# Altium PCB Carduino.PcbDoc
Units mm, origin at the board's own origin, x right, y up, seen from the top; angles counter-clockwise.
Board outline 89 x 51 mm, 2 copper layers (Top Layer, Bottom Layer); 29 components, 41 nets, 160 pads, 48 vias.
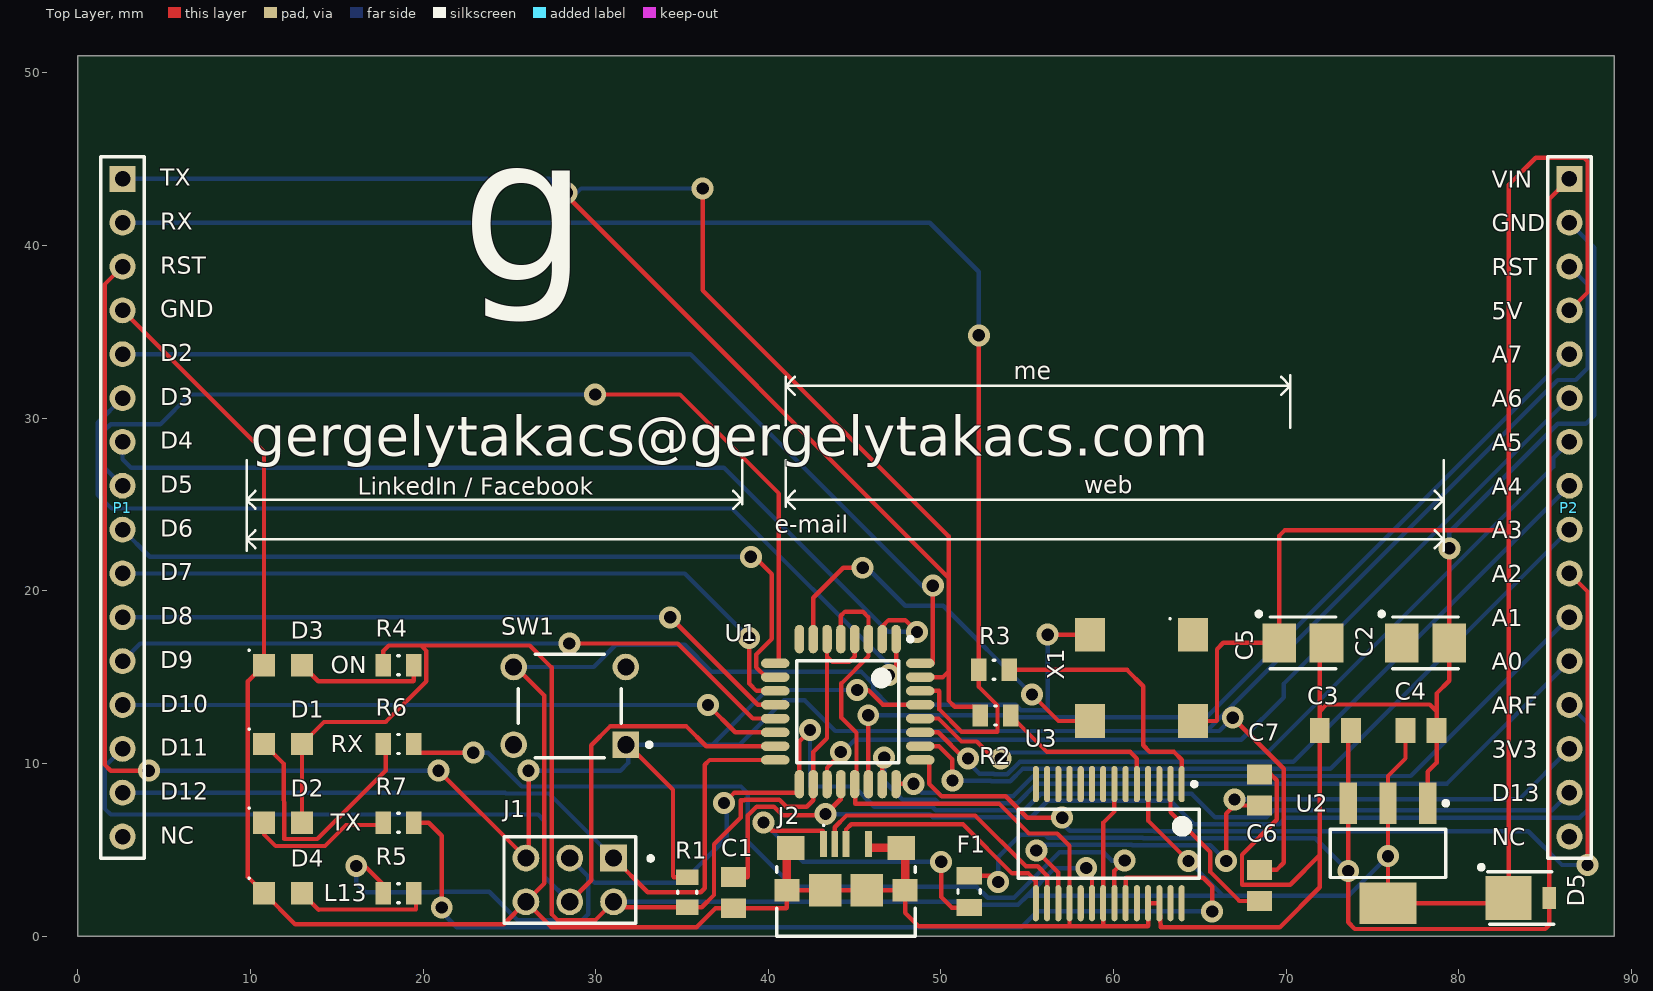
[diagram p0: Top Layer view]
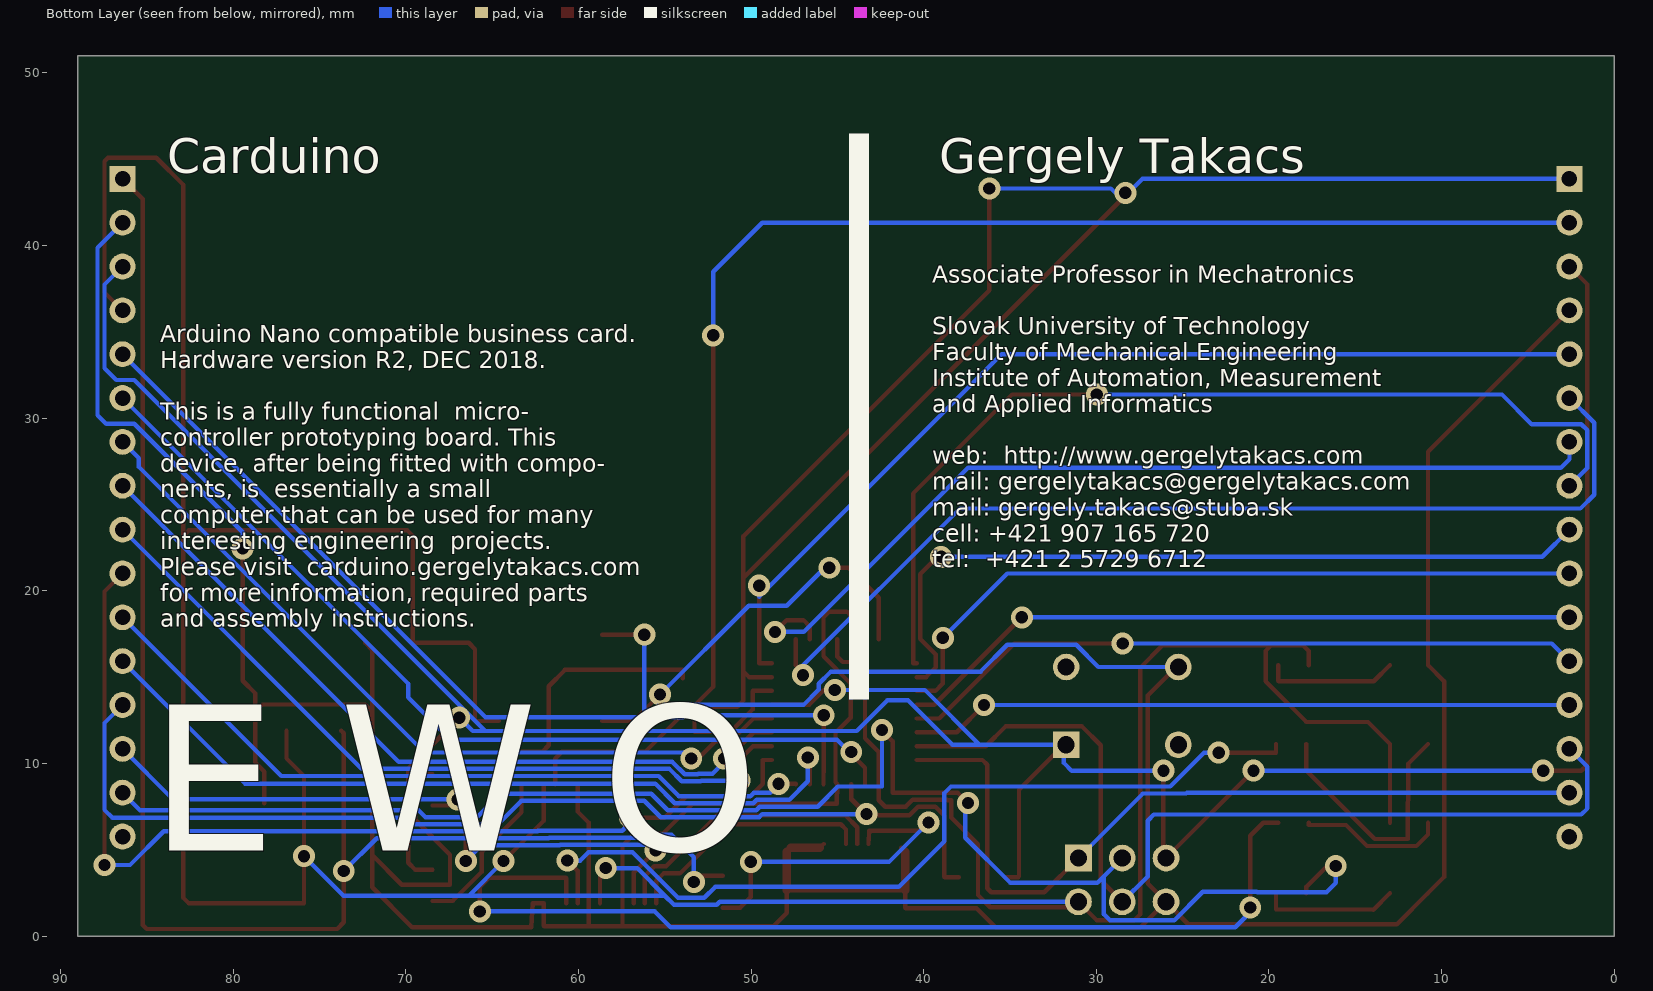
[diagram p1: Bottom Layer view, seen from below]

## Layer stack, top to bottom
Top Solder: solder mask 0.0102, Solder Resist, Dk 3.5
Top Layer: signal copper 0.0356
Dielectric 1: dielectric 0.32, FR-4, Dk 4.8
Bottom Layer: signal copper 0.0356
Bottom Solder: solder mask 0.0102, Solder Resist, Dk 3.5

## Board outline
0.001,-0.008 89.001,-0.008 89.001,50.992 0.001,50.992

## Design rules (kind name [scope] priority, off if disabled: settings)
Clearance PCBWay [All] p1: gap=0.152 ignorepadtopadclearanceinfootprint=FALSE except(0: Arc-Hole Track-Hole SMDPad-Hole THPad-Hole Via-Hole Fill-Hole Poly-Hole Region-Hole Text-Hole) // PCBWay Design Rules
HoleSize [All] p1: absolutevalues=TRUE maxlimit=6.3 minlimit=0.03 maxpercent=80.000 minpercent=20.000
MinimumAnnularRing [All] p1: minimumring=0.15
MinimumSolderMaskSliver MinimumSolderMaskSliver_1 [All] p1: minsoldermaskwidth=0.1
PolygonConnect [All] p1: connectstyle=Relief reliefconductorwidth=0.254 reliefentries=4 polygonreliefangle="90 Angle" airgapwidth=0.254
RoutingVias [All] p1: holewidth=0.711 width=1.27 viastyle="Through Hole" minholewidth=0.711 minwidth=1.27 maxholewidth=0.711 maxwidth=1.27
SilkToSolderMaskClearance [IsPad] p1: minsilkscreentomaskgap=0.15 clearancetoexposedcopper=TRUE
SolderMaskExpansion [All] p1: expansion=0.075
Width [All] p1: maxlimit=0.5 minlimit=0.15 preferedwidth=0.254 minimp=50.000000 maximp=50.000000 favimp=50.000000
27 further rules are at their usual default settings.

## Components (designator, comment, footprint, x,y, rotation, side; value= is the part's Value field where it differs from the comment)
C1 "100nF" CAPC2013X09N 37.973,2.515 r270 top
C2 "4.7uF" "CAP body B" 78.077,16.984 r0 top
C3 "100nF" CAPC2013X09N 72.848,11.904 r0 top
C4 "100nF" CAPC2013X09N 77.812,11.904 r0 top
C5 "4.7uF" "CAP body B" 70.965,16.984 r0 top
C6 "100nF" CAPC2013X09N 68.453,2.932 r90 top
C7 "100nF" CAPC2013X09N 68.454,8.464 r270 top
D1 "OSXX0805C1E" DIOC2012X09N 11.887,11.125 r0 top
D2 "OSXX0805C1E" DIOC2012X09N 11.887,6.553 r0 top
D3 "OSXX0805C1E" DIOC2012X09N 11.887,15.697 r0 top
D4 "OSXX0805C1E" DIOC2012X09N 11.887,2.489 r0 top
D5 "SS1P3L-M3/84A" DIOM3420X11N 84.226,2.21 r0 top
F1 "ECE SR050-06" RESC2113X12N 51.638,2.576 r90 top
J1 "Conn_3M_961206-6404-AR_eec" 3M_961206-6404-AR_0 28.499,3.251 r180 top
J2 "1981568-1" TECO-1981568-5_V 44.5,5.334 r0 top
P1 "Header 16" HDR1X16 2.591,43.866 r270 top
P2 "Header 16" HDR1X16 86.411,43.866 r270 top
R1 "1 k" RESC2112X05N 35.306,2.54 r90 top
R2 "1 k" RESC2112X05N 53.162,12.776 r0 top
R3 "1 k" RESC2112X05N 53.075,15.418 r180 top
R4 "270 Ohm, 0805" RESC2112X05N 18.575,15.697 r0 top
R5 "270 Ohm, 0805" RESC2112X05N 18.575,2.489 r0 top
R6 "270 Ohm, 0805" RESC2112X05N 18.575,11.125 r0 top
R7 "270 Ohm, 0805" RESC2112X05N 18.575,6.553 r0 top
SW1 "Switch_TE_1825910-7_eec" TE_1825910-7_0 28.499,13.335 r180 top
U1 "ATmega328P-AU" 32A_N 44.602,13 r270 top
U2 "LD1117S50TR" SOT-223_N 75.896,4.792 r270 top
U3 "FT232RL-Reel" SSOP-28_N 59.724,5.355 r270 top
X1 "16 MHz" DFN598P720X140-4N 61.62,14.961 r180 top

## Footprints (in the part's own frame and the unit in brackets; to place one, negate y for a bottom-side part, rotate by r counter-clockwise, add the part's x,y. Pads: shape width x height; smd on the part's side, far side on the other; paste and mask are expansions set on the pad)
3M_961206-6404-AR_0 [mm]
  rect 1.55x1.55 hole 1 paste-1000 mask+0: 1(-2.54,-1.27)
  round 1.55 hole 1 paste-1000 mask+0: 2(-2.54,1.27) 3(0,-1.27) 4(0,1.27) 5(2.54,-1.27) 6(2.54,1.27)
  silkscreen extent -4.81,-2.5 3.81,2.5, body extent -3.81,-2.57 3.81,2.51, height 8.47
32A_N [mm] "Thin QFP, 32-Leads, Body 7x7mm, Pitch 0.8mm, IPC Medium Density"
  oval 1.65x0.55 smd: 1(-4.2,2.8) 2(-4.2,2) 3(-4.2,1.2) 4(-4.2,0.4) 5(-4.2,-0.4) 6(-4.2,-1.2) 7(-4.2,-2) 8(-4.2,-2.8) 17(4.2,-2.8) 18(4.2,-2) 19(4.2,-1.2) 20(4.2,-0.4) 21(4.2,0.4) 22(4.2,1.2) 23(4.2,2) 24(4.2,2.8)
  oval 0.55x1.65 smd: 9(-2.8,-4.2) 10(-2,-4.2) 11(-1.2,-4.2) 12(-0.4,-4.2) 13(0.4,-4.2) 14(1.2,-4.2) 15(2,-4.2) 16(2.8,-4.2) 25(2.8,4.2) 26(2,4.2) 27(1.2,4.2) 28(0.4,4.2) 29(-0.4,4.2) 30(-1.2,4.2) 31(-2,4.2) 32(-2.8,4.2)
  silkscreen extent -4.32,-2.95 2.95,3.75, body extent -3.5,-3.5 3.5,3.5, height 1.2
"CAP body B" [mm] "Molded Capacitor, 2-Leads, Body 3.50x2.80mm, IPC Medium Density"
  rect 1.95x2.25 smd: 1(-1.375,0) 2(1.375,0)
  silkscreen extent -2.67,-1.5 1.9,1.8
CAPC2013X09N [mm] "Chip Capacitor, 2-Leads, Body 2.00x1.30mm, IPC Medium Density"
  rect 1.15x1.45 smd: 1(-0.9,0) 2(0.9,0)
  body extent -1.1,-0.72 1.1,0.72, height 0.88
DFN598P720X140-4N [mm] "DFN, 4-Leads, Body 5.20x7.20mm, Pitch 5.98mm, IPC Medium Density"
  rect 1.75x1.95 smd: 1(-2.99,-2.5) 2(2.99,-2.5) 3(2.99,2.5) 4(-2.99,2.5)
  silkscreen extent -1.7,-3.48 -1.6,-3.38
DIOC2012X09N [mm] "Chip Diode, 2-Leads, Body 2.00x1.25mm, IPC Medium Density"
  rect 1.3x1.3 smd: 1(-1.1,0) 2(1.1,0)
  silkscreen extent -2.01,0.81 -1.91,0.91
DIOM3420X11N [mil] "Molded Diode, 2-Leads, Body 3.40x2.03mm, IPC Medium Density"
  rect 105.12x100 smd: 1(-52.91,0)
  rect 30x50 smd: 2(40,0)
  silkscreen extent -120,-60 50,75
HDR1X16 [mm] "Connector; Header; 16 Position"
  rect 1.5x1.5 hole 0.9: 1(0,0)
  round 1.5 hole 0.9: 2(2.54,0) 3(5.08,0) 4(7.62,0) 5(10.16,0) 6(12.7,0) 7(15.24,0) 8(17.78,0) 9(20.32,0) 10(22.86,0) 11(25.4,0) 12(27.94,0) 13(30.48,0) 14(33.02,0) 15(35.56,0) 16(38.1,0)
  silkscreen extent -1.27,-1.27 39.37,1.27
RESC2112X05N [mm] "Chip Resistor, 2-Leads, Body 2.05x1.25mm, IPC Medium Density"
  rect 0.9x1.3 smd: 1(-0.875,0) 2(0.875,0)
  silkscreen extent -0.05,-0.55 0.05,0.55, body extent -1.1,-0.7 1.1,0.7, height 0.45
RESC2113X12N [mm] "Chip Resistor, 2-Leads, Body 2.10x1.35mm, IPC Medium Density"
  rect 1x1.5 smd: 1(-0.925,0) 2(0.925,0)
  silkscreen extent -0.1,-0.65 0.1,0.65, body extent -1.1,-0.75 1.1,0.75, height 1.25
SOT-223_N [mm] "SOT223, 4-Leads, Body 6.5x3.5mm, Pitch 2.3mm, Lead Span 7mm, IPC Medium Density"
  rect 2.4x1 smd: 1(-2.9,2.3) 2(-2.9,0) 3(-2.9,-2.3)
  rect 2.4x3.3 smd: 4(2.9,0)
  silkscreen extent -3.02,-3.35 1.4,3.48, body extent -1.85,-3.35 1.85,3.35, height 1.8
SSOP-28_N [mm] "SOP, 28-Leads, Body 10.2x5.3mm, Pitch 0.65mm, IPC Medium Density"
  oval 2.1x0.35 smd: 1(-3.45,4.225) 2(-3.45,3.575) 3(-3.45,2.925) 4(-3.45,2.275) 5(-3.45,1.625) 6(-3.45,0.975) 7(-3.45,0.325) 9(-3.45,-0.975) 10(-3.45,-1.625) 11(-3.45,-2.275) 12(-3.45,-2.925) 13(-3.45,-3.575) 14(-3.45,-4.225) 15(3.45,-4.225) 16(3.45,-3.575) 17(3.45,-2.925) 18(3.45,-2.275) 19(3.45,-1.625) 20(3.45,-0.975) 21(3.45,-0.325) 22(3.45,0.325) 23(3.45,0.975) 24(3.45,1.625) 25(3.45,2.275) 26(3.45,2.925) 27(3.45,3.575) 28(3.45,4.225)
  oval 2.1x0.35 smd mask+0.102: 8(-3.45,-0.325)
  silkscreen extent -3.57,-5.25 2,5.25, body extent -2.8,-5.25 2.8,5.25, height 2
TE_1825910-7_0 [mm]
  rect 1.54x1.54 hole 0.99 paste-1000 mask+0: 1(-3.25,2.25)
  round 1.54 hole 0.99 paste-1000 mask+0: 2(3.25,2.25) 3(-3.25,-2.25) 4(3.25,-2.25)
  silkscreen extent -4.73,-3 3,2.99
TECO-1981568-5_V [mm] "SMD, 5-Leads, Body 8x5.9mm, Pitch 0.65mm"
  rect 0.4x1.5 smd: 1(-1.3,0) 2(-0.65,0) 3(0,0) 5(1.3,0)
  rect 1.6x1.4 smd: 6(-3.2,-0.225) 7(3.2,-0.225)
  rect 1.45x1.3 smd: 8(-3.425,-2.675) 9(3.425,-2.675)
  rect 1.9x1.9 smd: 10(-1.2,-2.675) 11(1.2,-2.675)
  silkscreen extent -4,-5.33 4,1.12

## Part data
C1 C3 C4 C6 C7: library part "100 uF,  ceramic, 0805, Kemet", "Ceramic condenser MLCC; 100nF; 25V; X7R; ±10%; SMD; 0805"
C2 C5: library part "4.7uF, Tantallum", "4,7uF; 25VDC; SMD; Puzd: B; ±10%; -55÷125°C"
D1 D2 D3 D4: library part "OptoSupply RED", "OptoSupply Single Chip LED 0805", CREATOR="Gergely Takacs", CREATOR WWW=http://www.gergelytakacs.com, DATASHEET URL=https://www.tme.eu/sk/Document/6f99baddc8b38eb1a865ea6b78250b2b/OSXX0805C1E-DTE.pdf
D5: library part SS1P3L, "VISHAY SS1P3L-M3/84A  Dióda: usmeròovacia Schottky; SMD; 30V; 1A; DO220AA, SMP"
F1: "FUSE PTC RESETTABLE .50A"
J1: "CONN HEADER VERT DUAL 6POS GOLD", Digikey Part Number=3M9466-06-ND, Manufacturer=3M, Mouser Part Number=517-9612066404AR, Package=HDR6, Part Number="ICSP Header", Temperature="-25°C to +105°C", Temperature Range High=+105°C, Temperature Range Low=-25°C, ComponentLink1Description=Upverter, ComponentLink1URL=https://upverter.com/upn/revision/048db89806b755ca/, ComponentLink2Description=Datasheet, ComponentLink2URL=https://media.digikey.com/pdf/Data%20Sheets/3M%20PDFs/961_Series.pdf, Digikey Description="CONN HEADER VERT DUAL 6POS GOLD", helpURL=https://upverter.com/upn/revision/048db89806b755ca/, Lead Free=yes, Price=0.298634614737, RoHS=TRUE, Supplier 1=Digi-Key, Supplier 2=Mouser, Supplier Part Number 1=3M9466-06-ND, Supplier Part Number 2=517-9612066404AR
J2: "Micro USB Receptacle Standard Type B Assy, 5-Pin SMD, RoHS, Tape and Reel", Current Rating (Max)=1/ContactA, Manufacturer="TE Connectivity", Operating Temperature Max Deg. C=85C, Operating Temperature Min Deg. C=-55C, Operating Temp Range=-55Cto85C, Voltage Rating Max=30VAC, Body Orientation=RightAngle, Contact Material=CopperAlloy, Contact Plating=GoldOverNickel, DATASHEET URL=http://www.mouser.com/ds/2/418/NG_CD_1981568_E2-621296.pdf, Datasheet Version="Rev. E2, 08/2015", Gender=RCP, Housing Material=Thermoplastic, Manufacturer URL=http://www.te.com/, Mounting Style=SurfaceMount, Number of Contacts=5POS, Number of Ports=1Port, Number of Terminals=5, Packaging=TapeandReel, PartNumber=1981568-1, Pitch (mm)=0.65mm, Product Depth (mm)=5.6mm, Product Height (mm)=3mm, Product Length (mm)=8mm, Termination Method=Solder, Type=MicroUSB
P1 P2: "Header, 16-Pin", LatestRevisionDate=17-Jul-2002, LatestRevisionNote="Re-released for DXP Platform.", Publisher="Altium Limited"
R1 R2 R3: library part "1k, 0805, Royal Ohm", "ROYAL OHM HP05W3F1001T5E  Rezistor: thick film; vysokovýkonný; SMD; 0805; 1k?; 0,3W; ±1%"
R4 R5 R6 R7: library part "270 Ohm, 0805, Resistor", "VISHAY CRCW...BC Thick Film Commodity Resistor"
SW1: "SWITCH Tactile Switch SPST-NO Top Actuated Through Hole", Contact Rating @ Voltage="0.05A @ 24VDC", Digikey Part Number=450-1804-ND, Manufacturer=TE, Mouser Part Number=506-FSM4JAH, Operating Force=260gf, Package="Through Hole", Part Number=1825910-7, Temperature="-35°C to +85°C", Temperature Range High=+85°C, Temperature Range Low=-35°C, Actuator Height off PCB, Vertical=5.00mm, Actuator Material="Polybutylene Terephthalate (PBT)", Actuator Orientation="Top Actuated", Actuator Type=Standard, Circuit=SPST-NO, ComponentLink1Description=Upverter, ComponentLink1URL=https://upverter.com/upn/revision/149b3552d7425f0e/, ComponentLink2Description=Datasheet, ComponentLink2URL=http://www.te.com/commerce/DocumentDelivery/DDEController?Action=srchrtrv&DocNm=1825910&DocType=Customer+Drawing&DocLang=English, Digikey Description="SWITCH Tactile Switch SPST-NO Top Actuated Through Hole", helpURL=https://upverter.com/upn/revision/149b3552d7425f0e/, Illumination=Non-Illuminated, Lead Free=yes, Mechanical Life="100,000 Cycles", Mounting Type="Through Hole", Outline="6.00mm x 6.00mm", RoHS=TRUE, Supplier 1=Digi-Key, Supplier 2=Mouser, Supplier Part Number 1=450-1804-ND, Supplier Part Number 2=506-FSM4JAH, Switch Function=Off-Mom, Switch Travel=0.25mm, Termination Style="PC Pin"
U1: "8-bit AVR Microcontroller, 32KB Flash, 1KB EEPROM, 2KB SRAM, 32-pin TQFP, Industrial Grade (-40°C to 85°C)", Code_JEDEC=MS-026-ABA, ComponentLink1Description="Manufacturer URL", ComponentLink1URL=http://www.atmel.com/, ComponentLink2Description="ATmega48A/48PA/88A/88PA/168A/168PA/328/328P Datasheet", ComponentLink2URL=http://www.atmel.com/dyn/resources/prod_documents/doc8271.pdf, ComponentLink3Description="ATmega48A/48PA/88A/88PA/168A/168PA/328/328P Summary", ComponentLink3URL=http://www.atmel.com/dyn/resources/prod_documents/8271S.pdf, DatasheetVersion="revD, May-2011", PackageDescription="32-Lead, 7x7x1.0 mm Body, 0.8mm Lead Pitch, Thin Profile Plastic Quad Flat Package (TQFP)", PackageReference=32A, PackageVersion="revC, Oct-2010"
U2: "Fixed Low Drop Positive Voltage Regulator, 5V, 4-Pin SOT-223, Tape and Reel", ComponentLink1Description="Manufacturer URL", ComponentLink1URL=http://www.st.com, ComponentLink2Description=Datasheet, ComponentLink2URL=http://www.st.com/internet/com/TECHNICAL_RESOURCES/TECHNICAL_LITERATURE/DATASHEET/CD00000544.pdf, DatasheetVersion=Nov-2011, PackageDescription="4-Pin SOT-223 Package, 6.5 x 3.5 mm Body, 2.3 mm Pitch, 7 mm Lead Span", PackageReference=SOT-223, PackageVersion=2010, PartNumber=LD1117S50TR
U3: "USB UART Asynchronous Serial Data Transfer Chip, 28-pin SSOP, Tape and Reel", Manufacturer=FTDI, ComponentLink1Description="Manufacturer URL", ComponentLink1URL=http://www.ftdichip.com/, ComponentLink2Description=Datasheet, ComponentLink2URL=http://www.ftdichip.com/Support/Documents/DataSheets/ICs/DS_FT232R.pdf, DatasheetVersion="ver 2.10, Mar-2012", PackageDescription="28-Pin Small Outline Package 0.65 mm Pitch", PackageReference=SSOP-28, PackageVersion=Mar-12, PartNumber=FT232RL-Reel
X1: library part "16 MHz, IQD FREQUENCY PRODUCTS", "QD FREQUENCY PRODUCTS LF SPXO018034"

## Via types
v1: diameter 1.27, hole 0.711, Top Layer to Bottom Layer, 48 vias

## Nets (pads, with @x,y where several pads share a name; then routed paths per layer and width w, separated by ;. In a path a pad name is that pad's centre, name@x,y a point inside that pad or via, vN(x,y) a via of type N, cw(c..) or ccw(c..) an arc to the next point about the centre after c; other vN are vias at no path point)
3V3: C7.2 P2.14 U3.17 | length 41.1
  Top Layer w0.254: v1(55.525,4.958) 56.799,3.684 U3.17 ; v1(66.523,4.348) 66.523,7.095 66.993,7.564 v1@67.358,7.564 ; v1(67.006,7.917) v1@67.358,7.564 ; C7.2 v1@67.358,7.564
  Bottom Layer w0.254: v1(55.525,4.958) 55.855,5.288 61.062,5.288 61.088,5.262 65.609,5.262 v1(66.523,4.348) ; v1(67.006,7.917) 83.482,7.917 P2.14
5V: C4.1 C5.1 D1.2 D2.2 D5.1 J1.2 P2.4 R1.1 R4.1 U1.4 U1.6 U1.18 U2.2 U2.4 U3.4 U3.20 X1.4 | length 237.5
  Top Layer w0.254: D2.2 D1.2 14.262,12.4 17.832,12.4 20.194,14.762 20.194,16.515 19.876,16.832 ; R4.1 17.7,16.515 18.018,16.832 19.876,16.832 ; U1.6 43.402,16.197 ; U1.4 45.002,16.197 44.685,15.88 43.72,15.88 43.402,16.197 ; v1(58.42,3.937) 58.42,3.815 58.749,3.486 U3.20 ; U3.4 61.999,6.688 v1(64.339,4.348) ; X1.4 65.965,12.461 65.99,12.486 65.99,16.616 66.358,16.984 C5.1 69.59,23.182 69.907,23.5 82.565,23.5 82.882,23.182 ; C4.1 76.912,10.292 75.896,9.276 U2.2 v1(75.896,4.627) U2.4 82.565,1.892 D5.1 82.882,23.182 ; P2.4 87.453,37.288 87.453,44.886 87.254,45.085 84.455,45.085 82.882,43.512 82.882,23.182 ; 19.876,16.832 26.176,16.832 27.444,15.563 27.444,1.275 27.792,0.927 29.984,0.927 J1.2 31.355,1.665 R1.1 36.142,1.665 36.856,2.379 36.856,5.318 38.406,6.868 38.406,7.879 38.608,7.879 38.633,7.904 40.641,7.904 41.047,7.498 42.228,7.498 42.602,7.872 U1.18 42.602,10.666 43.402,11.466 43.402,16.197
  Bottom Layer w0.254: J1.2 51.821,1.981 51.995,1.808 54.463,1.808 54.996,2.341 ; v1(58.42,3.937) 56.592,3.937 54.996,2.341 ; v1(64.339,4.348) 66.346,2.341 ; v1(75.896,4.627) 73.61,2.341 66.346,2.341 ; 54.996,2.341 66.346,2.341
A0: P2.12 U1.23 | length 46.6
  Top Layer w0.254: U1.23 46.602,10.233 v1(46.711,10.342)
  Bottom Layer w0.254: v1(46.711,10.342) 46.711,8.971 47.779,7.903 49.665,7.903 49.872,7.696 54.416,7.696 55.551,8.831 79.316,8.831 P2.12
A1: P2.11 U1.24 | length 43.6
  Top Layer w0.254: U1.24 47.402,8.818 v1(48.413,8.818)
  Bottom Layer w0.254: v1(48.413,8.818) 48.413,8.792 48.896,8.309 49.834,8.309 50.04,8.103 54.18,8.103 55.353,9.276 77.221,9.276 P2.11
A2: P2.10 U1.25 | length 59.5
  Top Layer w0.254: U1.25 49.328,10.2 49.328,8.815 50.04,8.103 53.752,8.103 54.996,6.858 v1(57.023,6.858) ; P2.10 87.453,19.964 v1(87.453,4.119)
  Bottom Layer w0.254: v1(57.023,6.858) 57.023,6.546 57.468,6.101 62.345,6.101 62.371,6.075 84.024,6.075 85.98,4.119 v1(87.453,4.119)
A3: P2.9 U1.26 | length 45.7
  Top Layer w0.254: U1.26 49.886,11 50.648,10.239 50.648,9.042 v1(50.673,9.017)
  Bottom Layer w0.254: v1(50.673,9.017) 50.461,9.017 50.44,8.996 52.89,8.996 52.92,8.966 54.014,8.966 54.73,9.682 72.547,9.682 P2.9
A4: P2.8 U1.27 | length 45.7
  Top Layer w0.254: U1.27 49.838,11.8 51.351,10.287 v1(51.562,10.287)
  Bottom Layer w0.254: v1(51.562,10.287) 51.562,10.076 52.236,9.403 53.058,9.403 53.088,9.373 53.846,9.373 54.561,10.088 70.413,10.088 P2.8
A5: P2.7 U1.28 | length 46.5
  Top Layer w0.254: U1.28 49.861,12.6 51.193,11.268 52.072,11.268 53.053,10.287 v1(53.467,10.287)
  Bottom Layer w0.254: v1(53.467,10.287) 53.814,10.634 68.921,10.634 85.46,27.173 85.46,27.675 P2.7
A6: P2.6 U1.19 | length 53.5
  Top Layer w0.254: U1.19 43.402,9.751 44.196,10.545 v1(44.196,10.668)
  Bottom Layer w0.254: v1(44.196,10.668) 44.196,10.545 45.021,11.369 67.4,11.369 69.869,13.838 69.869,14.624 P2.6
A7: P2.5 U1.22 | length 53.4
  Top Layer w0.254: v1(45.788,12.793) 45.788,9.498 45.802,9.498 U1.22
  Bottom Layer w0.254: v1(45.788,12.793) 53.836,12.793 53.95,12.679 65.384,12.679 P2.5
AREF: C1.1 P2.13 U1.20 | length 64.8
  Top Layer w0.254: C1.1 38.787,3.415 38.812,3.44 38.812,6.99 39.32,7.498 40.323,7.498 40.831,6.99 43.282,6.99 44.202,7.909 44.202,7.96 ; v1(43.308,7.066) 44.202,7.96 ; U1.20 44.202,7.96
  Bottom Layer w0.254: v1(43.308,7.066) 49.353,7.066 49.535,6.883 55.229,6.883 56.186,7.84 63.303,7.84 64.662,6.482 69.597,6.482 69.978,6.863 87.009,6.863 87.453,7.307 87.453,12.344 P2.13
D0/RX: P1.2 R3.2 U1.30 | length 83.9
  Top Layer w0.254: U1.30 49.886,14.2 49.912,14.175 49.912,13.124 51.195,11.841 53.252,11.841 53.277,11.866 53.277,13.354 52.2,14.432 R3.2 52.197,15.42 v1(52.197,34.798)
  Bottom Layer w0.254: P1.2 49.358,41.326 52.197,38.486 v1(52.197,34.798)
D1/TX: P1.1 R2.1 U1.31 | length 105.9
  Top Layer w0.254: v1(28.321,43.053) 28.321,42.881 50.445,20.756 ; v1(36.195,43.307) 36.195,37.415 50.445,23.165 50.445,20.756 ; U1.31 50.115,15 50.445,15.33 ; R2.1 52.287,13.289 50.801,13.289 50.445,13.644 50.445,15.33 ; 50.445,15.33 50.445,20.756
  Bottom Layer w0.254: P1.1 27.327,43.866 v1@28.321,42.871 ; v1(28.321,43.053) v1@28.321,42.871 ; v1(36.195,43.307) 29.155,43.307 28.52,42.672 v1@28.321,42.871
D2: P1.5 U1.32 | length 58.6
  Top Layer w0.254: U1.32 49.531,15.8 v1(49.531,20.299)
  Bottom Layer w0.254: P1.5 35.489,33.706 49.531,19.664 v1(49.531,20.299)
D3: P1.6 U1.1 | length 59.1
  Top Layer w0.254: v1(46.99,15.113) 46.99,15.274 47.402,15.687 U1.1
  Bottom Layer w0.254: P1.6 1.155,29.73 1.155,25.571 1.957,24.77 37.903,24.77 47.117,15.555 46.99,15.428 v1(46.99,15.113)
D4: P1.7 U1.2 | length 54.4
  Top Layer w0.254: U1.2 46.602,17.937 46.97,18.304 47.931,18.304 v1(48.616,17.619)
  Bottom Layer w0.254: P1.7 2.591,27.627 3.086,27.132 37.429,27.132 46.942,17.619 v1(48.616,17.619)
D5: P1.8 U1.9 | length 56
  Top Layer w0.254: v1(29.972,31.369) 34.88,31.369 40.615,25.633 40.615,15.8 U1.9
  Bottom Layer w0.254: P1.8 1.561,27.115 1.561,29.311 1.906,29.655 4.785,29.655 6.499,31.369 v1(29.972,31.369)
D6: P1.9 U1.10 | length 45.8
  Top Layer w0.254: v1(38.989,21.971) 39.198,21.971 40.209,20.96 40.209,17.222 39.298,16.311 39.298,15.562 39.86,15 U1.10
  Bottom Layer w0.254: P1.9 4.166,21.971 v1(38.989,21.971)
D7: P1.10 U1.11 | length 42.2
  Top Layer w0.254: v1(38.892,17.273) 38.892,14.628 39.32,14.2 U1.11
  Bottom Layer w0.254: P1.10 35.159,21.006 v1(38.892,17.273)
D8: P1.11 U1.12 | length 39.9
  Top Layer w0.254: v1(34.316,18.466) 39.382,13.4 U1.12
  Bottom Layer w0.254: P1.11 v1(34.316,18.466)
D9: P1.12 U1.13 | length 40
  Top Layer w0.254: v1(28.474,16.946) 34.748,16.946 39.094,12.6 U1.13
  Bottom Layer w0.254: P1.12 3.611,16.946 v1(28.474,16.946)
D10: P1.13 U1.14 | length 38.5
  Top Layer w0.254: v1(36.502,13.386) 38.088,11.8 U1.14
  Bottom Layer w0.254: P1.13 v1(36.502,13.386)
D11/MOSI: J1.4 P1.14 U1.15 | length 56.1
  Top Layer w0.254: J1.4 29.744,3.227 29.744,11.054 30.836,12.146 35.256,12.146 36.402,11 U1.15
  Bottom Layer w0.254: P1.14 1.55,9.805 1.55,7.396 1.906,7.04 26.671,7.04 27.026,6.685 27.026,3.454 J1.4
D12/MISO: J1.1 P1.15 U1.16 | length 47.6
  Top Layer w0.254: J1.1 33.02,2.54 36.09,2.54 36.322,2.772 36.322,9.922 36.6,10.2 U1.16
  Bottom Layer w0.254: P1.15 24.745,8.306 24.791,8.26 27.3,8.26 J1.1
D13/SCK: J1.3 P2.15 R5.1 U1.17 | length 91
  Top Layer w0.254: v1(16.129,4.064) 16.627,4.064 17.841,2.849 R5.1@17.841,2.489 ; v1(37.434,7.707) 38.037,8.31 41.802,8.31 U1.17 41.802,11.28 42.418,11.896 v1(42.418,11.938)
  Bottom Layer w0.254: v1(16.129,4.064) 16.129,3.079 16.666,2.542 20.68,2.542 20.703,2.565 23.831,2.565 25.477,0.919 29.211,0.919 29.566,1.275 29.566,3.454 ; J1.3 29.566,3.454 ; v1(37.434,7.707) 37.593,7.548 37.593,5.694 34.977,3.078 29.942,3.078 29.566,3.454 ; v1(42.418,11.938) 42.418,8.665 44.972,8.665 46.141,7.496 49.497,7.496 49.704,7.29 54.822,7.29 55.779,8.247 64.522,8.247 65.881,6.888 68.861,6.888 69.267,7.293 85.398,7.293 P2.15
GND: C1.2 C2.2 C3.1 C4.2 C5.2 C7.1 D3.1 D4.1 J1.6 J2.5 J2.6 J2.7 J2.8 J2.9 J2.10 J2.11 P1.4 P2.2 SW1.4 U1.3 U1.5 U1.21 U2.1 U3.7 U3.18 U3.21 U3.25 U3.26 X1.2 | length 284.9
  Top Layer w0.254: P1.4 10.787,28.049 D3.1 9.856,14.766 9.856,3.42 D4.1 12.586,0.69 24.668,0.69 J1.6 ; SW1.4@25.376,15.585 27.026,13.934 27.026,3.049 J1.6 ; J2.6@41.075,4.884 J2.6 ; U1.5 44.202,18.548 44.45,18.796 45.466,18.796 45.802,18.46 U1.3 45.802,16.202 44.235,14.635 44.235,12.646 45.11,11.771 45.11,8.908 U1.21 45.028,7.675 53.366,7.675 55.098,5.944 56.742,5.944 57.449,5.237 U3.18 57.449,0.589 ; J2.5 46.025,5.109 ; J2.7 J2.7@47.925,4.884 ; v1(56.186,17.461) X1.2 ; U3.7 60.049,7.216 59.411,6.578 59.411,2.824 59.399,2.824 U3.21 59.399,0.589 ; C7.1 69.122,9.364 69.458,9.028 69.458,6.736 67.438,4.715 67.438,3.002 67.463,2.976 70.232,2.976 71.948,4.692 ; C5.2 71.948,16.592 71.948,13.022 ; U2.1 78.196,9.53 78.712,10.045 C4.2 78.712,13.022 ; v1(79.452,22.458) C2.2 79.452,14.791 78.712,14.051 78.712,13.022 ; J1.6 27.42,0.52 35.848,0.52 36.942,1.615 C1.2 41.047,1.615 41.075,1.642 J2.8 J2.10 J2.11 J2.9 47.925,1.344 48.705,0.563 57.424,0.563 57.449,0.589 ; 57.449,0.589 57.474,0.563 59.374,0.563 59.399,0.589 ; 59.399,0.589 59.424,0.563 61.974,0.563 61.999,0.589 U3.25 U3.26 62.725,0.513 69.635,0.513 71.948,2.826 71.948,4.692 ; 71.948,4.692 C3.1 71.948,13.022 ; 71.948,13.022 72.342,13.416 78.318,13.416 78.712,13.022
  Top Layer w0.5: J2.8 J2.6@41.075,4.884 ; 46.025,5.109 J2.7 ; J2.9 J2.7@47.925,4.884
  Bottom Layer w0.254: SW1.4@25.376,15.585 29.882,15.585 31.167,16.87 35.154,16.87 36.704,15.321 45.376,15.321 46.076,14.621 46.076,14.28 46.965,13.39 54.331,13.39 54.636,13.086 56.16,13.086 56.186,13.111 v1(56.186,17.461) ; v1(79.452,22.458) 79.452,23.398 85.726,29.672 87.364,29.672 87.859,30.167 87.859,39.877 P2.2
"LED RX": R6.2 U3.22 | length 50.7
  Top Layer w0.254: R6.2@19.591,11.125 19.591,10.622 v1(22.912,10.622) ; U3.22 60.049,3.779 v1(60.643,4.373)
  Bottom Layer w0.254: v1(22.912,10.622) 23.763,10.622 25.718,8.666 38.418,8.666 38.798,8.286 38.798,5.491 41.44,2.849 52.071,2.849 52.706,2.214 54.23,2.214 56.867,4.851 59.416,4.851 59.894,4.373 v1(60.643,4.373)
"LED TX": R7.2 U3.23 | length 59.9
  Top Layer w0.254: R7.2 19.45,6.558 20.334,6.558 21.082,5.809 v1(21.082,1.651) ; U3.23 60.699,3.357 60.724,3.383 65.19,3.383 65.711,2.862 v1(65.711,1.427)
  Bottom Layer w0.254: v1(21.082,1.651) 21.082,1.377 21.946,0.513 54.662,0.513 55.576,1.427 v1(65.711,1.427)
NetC6_1: C6.1 U3.2 | length 9.6
  Top Layer w0.254: U3.2 63.299,7.167 65.609,4.857 65.609,3.713 67.29,2.032 C6.1
NetD1_1: D1.1 R6.1 | length 15
  Top Layer w0.254: D1.1 11.939,9.974 11.964,5.624 13.872,5.624 17.841,9.593 R6.1@17.841,11.125
NetD2_1: D2.1 R7.1 | length 8.5
  Top Layer w0.254: D2.1 10.787,5.886 11.456,5.217 14.323,5.217 15.536,6.431 17.7,6.431 R7.1
NetD3_2: D3.2 R4.2 | length 7.8
  Top Layer w0.254: D3.2 13.922,14.762 19.425,14.762 19.45,14.787 R4.2
NetD4_2: D4.2 R5.2 | length 7.9
  Top Layer w0.254: D4.2 13.948,1.529 19.591,1.554 R5.2@19.591,2.489
NetF1_1: F1.1 J2.1 | length 19.6
  Top Layer w0.254: v1(39.726,6.583) 40.198,6.111 43.164,6.111 J2.1 ; v1(50.013,4.297) 50.013,2.26 50.623,1.651 F1.1
  Bottom Layer w0.254: v1(39.726,6.583) 42.012,4.297 v1(50.013,4.297)
NetJ2_2: J2.2 U3.16 | length 16.6
  Top Layer w0.254: J2.2 43.85,6.304 44.531,6.985 51.981,6.985 54.928,4.037 55.609,4.037 56.149,3.497 U3.16
NetJ2_3: J2.3 U3.15 | length 14.6
  Top Layer w0.254: J2.3 44.5,6.172 44.805,6.477 51.276,6.477 54.122,3.631 55.067,3.631 55.499,3.199 U3.15
NetU1_7: U1.7 X1.3 | length 22.8
  Top Layer w0.254: U1.7 42.602,19.594 44.345,21.336 v1(45.466,21.336) ; v1(55.271,14) 56.811,12.461 X1.3
  Bottom Layer w0.254: v1(45.466,21.336) 45.725,21.336 47.931,19.131 50.14,19.131 v1(55.271,14)
RESET: C6.2 J1.5 P1.3 P2.3 R1.2 SW1.1 U1.29 | length 176.8
  Top Layer w0.254: P1.3 1.55,37.745 1.55,9.936 1.906,9.58 v1(4.116,9.58) ; v1(20.9,9.58) J1.5 26.112,4.674 v1(26.112,9.58) ; SW1.1@31.876,11.085 34.48,8.481 34.48,3.454 34.519,3.415 R1.2 ; v1(45.149,14.254) 45.784,14.254 46.638,13.4 U1.29 ; v1(66.904,12.654) 69.865,9.693 69.865,4.252 69.444,3.832 C6.2
  Bottom Layer w0.254: v1(4.116,9.58) v1(20.9,9.58) ; v1(26.112,9.58) 31.433,9.58 31.876,10.023 31.876,11.085 36.761,11.085 ; v1(45.149,14.254) 39.93,14.254 36.761,11.085 ; v1(66.904,12.654) 66.13,11.879 65.393,11.879 ; P2.3 87.453,37.744 87.453,32.898 86.767,32.212 85.726,32.212 65.393,11.879 ; 36.761,11.085 38.336,11.085 40.908,13.657 42.101,13.657 43.879,11.879 65.393,11.879
RX: R3.1 U3.1 | length 16.1
  Top Layer w0.254: R3.1@53.95,14.94 R3.1 60.782,15.418 61.722,14.478 61.722,11.049 62.103,10.668 63.5,10.668 63.949,10.219 U3.1
TX: R2.2 U3.5 | length 9.8
  Top Layer w0.254: R2.2 56.145,10.668 60.96,10.668 61.349,10.279 U3.5
VUSB: C3.2 D5.2 F1.2 P2.1 U2.3 | length 91.8
  Top Layer w0.254: F1.2 52.943,3.501 v1(53.315,3.129) ; C3.2 73.596,11.752 U2.3 v1(73.596,3.764) 73.596,0.793 73.978,0.411 85.014,0.411 85.242,0.64 D5.2 85.242,42.697 P2.1
  Bottom Layer w0.254: v1(53.315,3.129) 53.315,4.577 54.611,5.872 56.032,5.872 56.21,5.694 61.694,5.694 61.719,5.669 71.691,5.669 v1(73.596,3.764)
pads on no net: C2.1 P1.16 P2.16 SW1.2 SW1.3 U1.8 U3.3 U3.6 U3.8 U3.9 U3.10 U3.11 U3.12 U3.13 U3.14 U3.19 U3.24 U3.27 U3.28 X1.1

## Silkscreen, mask and mechanical layers (free items; w line width, h text height)
Top Overlay:
  drawing of 83 lines, arcs and shapes, not listed
  text "TX" at 4.775,43.459 h1
  text "VIN" at 81.915,43.358 h1
  text "RX" at 4.775,40.919 h1
  text "GND" at 81.915,40.818 h1
  text "RST" at 4.775,38.379 h1
  text "RST" at 81.915,38.278 h1
  text "GND" at 4.775,35.839 h1
  text "5V" at 81.915,35.738 h1
  text "g" at 22.225,34.544 h18
  text "D2" at 4.775,33.299 h1
  text "A7" at 81.915,33.198 h1
  text "me" at 54.229,32.258 h1
  text "D3" at 4.775,30.759 h1
  text "A6" at 81.915,30.658 h1
  text "D4" at 4.775,28.219 h1
  text "A5" at 81.915,28.118 h1
  text "gergelytakacs@gergelytakacs.com" at 10.033,27.813 h2.3
  text "D5" at 4.775,25.679 h1
  text "web" at 58.293,25.654 h1
  text "A4" at 81.915,25.578 h1
  text "LinkedIn / Facebook" at 16.231,25.552 h1
  text "e-mail" at 40.386,23.368 h1
  text "D6" at 4.775,23.139 h1
  text "A3" at 81.915,23.038 h1
  text "D7" at 4.775,20.599 h1
  text "A2" at 81.915,20.498 h1
  text "D8" at 4.775,18.059 h1
  text "A1" at 81.915,17.958 h1
  text "D9" at 4.775,15.519 h1
  text "A0" at 81.915,15.418 h1
  text "ON" at 14.667,15.232 h1
  text "D10" at 4.775,12.979 h1
  text "ARF" at 81.915,12.878 h1
  text "RX" at 14.667,10.66 h1
  text "D11" at 4.775,10.439 h1
  text "3V3" at 81.915,10.338 h1
  text "D12" at 4.775,7.899 h1
  text "D13" at 81.915,7.798 h1
  text "TX" at 14.667,6.088 h1
  text "NC" at 4.775,5.359 h1
  text "NC" at 81.915,5.258 h1
  text "L13" at 14.25,2.024 h1
Bottom Overlay:
  drawing of 87 lines, arcs and shapes, not listed
  text "Gergely Takacs" at 39.097,44.196 h2
  text "Carduino" at 83.82,44.196 h2
  text "Associate Professor in Mechatronics /  / Slovak University of Technology / Faculty of Mechanical Engineering / Institute of Automation, Measurement  / and Applied Informatics /  / web:  http://www.gergelytakacs.com / mail: gergelytakacs@gergelytakacs.com / mail: gergely.takacs@stuba.sk / cell: +421 907 165 720 / tel:  +421 2 5729 6712" at 39.497,21.353 h1
  text "Arduino Nano compatible business card. / Hardware version R2, DEC 2018.  /  / This is a fully functional  micro- / controller prototyping board. This / device, after being fitted with compo- / nents, is  essentially a small / computer that can be used for many  / interesting engineering  projects.  / Please visit  carduino.gergelytakacs.com / for more information, required parts / and assembly instructions." at 84.22,17.907 h1
  text "E W O" at 84.836,2.159 h14.5
Mechanical 1:
  the board outline again, w0.2